# EAGLE board FD Capacitance Sensor v18a (EAGLE 9.6.2)
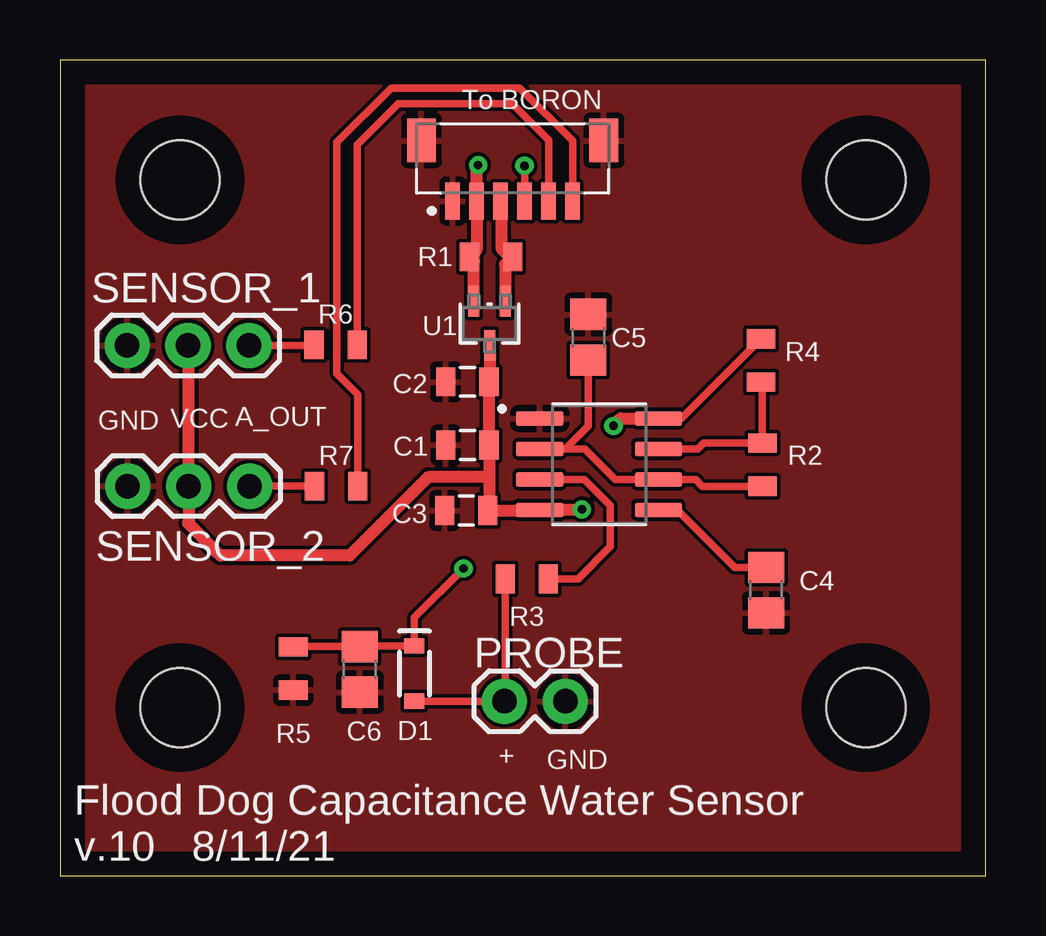
[diagram p0: board, top side]
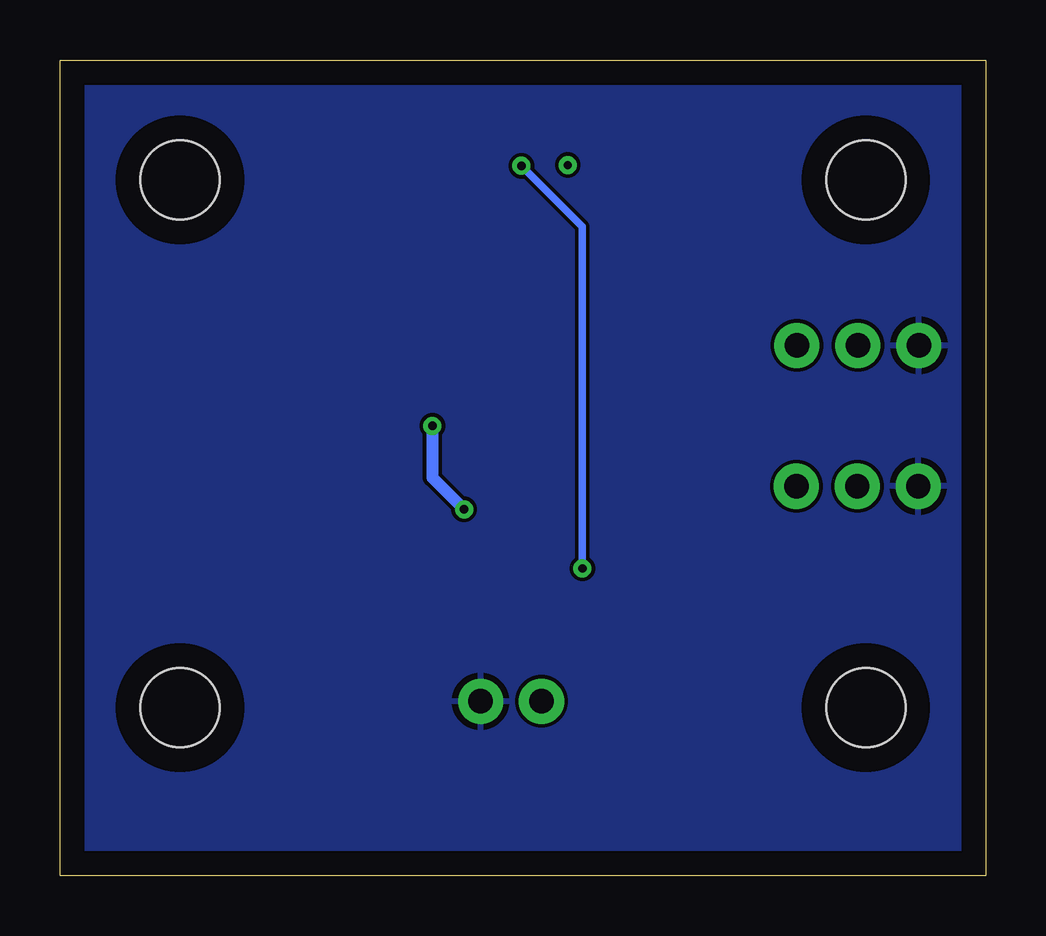
[diagram p1: board, bottom side, seen from below]

Size 38.58 x 34 mm. Coordinates in mm from the lower left corner, seen from the top.
Outline: 0,0 38.58,0 38.58,34 0,34 0,0
Copper layers (1*16): Top 0.035mm / dielectric 1.5mm / Bottom 0.035mm
Design rules "default": minimum track width 6mil, minimum drill 0.35mm, track to track 6mil, track to pad 6mil, pad to pad 6mil, via to via 6mil, smd to smd 6mil, copper to edge 40mil, drill to drill 6mil, minimum pad ring 10mil, minimum via ring 8mil, stop-mask expansion 4mil, vias tented up to drill 0mil, thermal gap 10mil

## Footprints (pad centres in the part's own frame; a part is rotated, then mirrored left to right if it is on the bottom)
0805@1 = smd 0.8 x 1.2: 1 -0.9,0; 2 0.9,0
C0805 = smd 1.3 x 1.5: 1 -0.95,0; 2 0.95,0
SOD-323 = smd 0.63 x 0.83: A 1.15,0; C -1.15,0
JST_BM06B-SRSS-TB(LF)(SN) = smd 0.6 x 1.55: 1 -2.5,-2.525; 2 -1.5,-2.525; 3 -0.5,-2.525; 4 0.5,-2.525; 5 1.5,-2.525; 6 2.5,-2.525 | smd 1.2 x 1.8: S1 -3.8,0; S2 3.8,0
1X02 = drill 1.016 pad 1.88: 1 0,0; 2 2.54,0
0805 = smd 0.8 x 1.2: 1 -0.9,0; 2 0.9,0
1X03 = drill 1.016 pad 1.88: 1 0,0; 2 2.54,0; 3 5.08,0
SOT_101PT1_ONS = smd 0.457 x 1.27: 1 -0.65,-0.914; 2 0.65,-0.914; 3 0,0.914
SOIC127P599X175-8N = smd 1.97 x 0.6: 1 -2.47,1.905; 2 -2.47,0.635; 3 -2.47,-0.635; 4 -2.47,-1.905; 5 2.47,-1.905; 6 2.47,-0.635; 7 2.47,0.635; 8 2.47,1.905
STAND-OFF = hole 3.302: 0,0

## Placement (x,y rotation side)
C1  0.1uF  [0805@1]  16.98,17.95 180 top
C2  1uF  [0805@1]  16.98,20.58 180 top
C3  10nF  [0805@1]  16.93,15.22 180 top
C4  10nf  [C0805]  29.42,11.9 90 top
C5  470pf  [C0805]  22.02,22.44 270 top
C6  1uF  [C0805]  12.49,8.59 90 top
D1  250mA/100V  [SOD-323]  14.77,8.42 270 top
FRAME1  FRAME-LETTERNO_PACKAGE  [DUMMY]  -8.43,-5.36 0 top  (outside the outline)
J1  BM06B-SRSS-TBT(LF)(SN)  [JST_BM06B-SRSS-TB(LF)(SN)]  18.86,30.65 0 top
PROBE  [1X02]  18.52,7.26 0 top
R1  100k  [0805]  17.97,25.79 180 top
R2  1k  [0805]  29.27,17.13 90 top
R3  10k  [0805]  19.45,12.37 180 top
R4  330  [0805]  29.21,21.47 90 top
R5  1M  [0805]  9.72,8.63 90 top
R6  1k  [0805]  11.48,22.12 0 top
R7  1k  [0805]  11.51,16.23 0 top
SENSOR_1  [1X03]  2.79,22.1 0 top
SENSOR_2  [1X03]  2.82,16.23 0 top
U1  NTS4101PT1  [SOT_101PT1_ONS]  17.9,23.01 180 top
U2  TLC555CD  [SOIC127P599X175-8N]  22.46,17.15 0 top
U$1  STAND-OFF  [STAND-OFF]  5,7 0 top
U$2  STAND-OFF  [STAND-OFF]  5,29 0 top
U$3  STAND-OFF  [STAND-OFF]  33.58,29 0 top
U$4  STAND-OFF  [STAND-OFF]  33.58,7 0 top

## Library data of the parts
C1 = Custom Components; HOUSEPART: YES; MPN: MF-CAP-0805-0.1uF; POPULATE: 1; URL: https://factory.macrofab.com/part/MF-CAP-0805-0.1uF
C2 = Custom Components; HOUSEPART: yes; MPN: MF-CAP-0805-1uF; POPULATE: 1; URL: https://factory.macrofab.com/part/MF-CAP-0805-1uF
C3 = Custom Components; DIGIKEY: 399-C0805X103K1RAC3316CT-ND; HOUSEPART: NO; MPN: C0805X103K1RAC3316; POPULATE: 1; URL: https://www.digikey.com/en/products/detail/kemet/C0805X103K1RAC3316/10315780
C4-C6 = rcl; SPICEPREFIX: C
D1 = Custom Components; MPN: BAS16HT1G
FRAME1 = SparkFun-Aesthetics; DESIGNER: Nobody; VERSION: v01
J1 = Custom Components; MPN: BM06B-SRSS-TBT(LF)(SN); POPULATE: 1
PROBE SENSOR_1 SENSOR_2 = SparkFun-Connectors
R1 = Custom Components; MPN: MF-RES-0805-100K; POPULATE: 1; URL: https://factory.macrofab.com/part/MF-RES-0805-100K
R2 R5-R7 = Custom Components; HOUSEPART: YES; MPN: MF-RES-0805-1K; POPULATE: 1; URL: https://factory.macrofab.com/part/MF-RES-0805-1k
R3 = Custom Components; MPN: MF-RES-0805-10K; POPULATE: 1; URL: https://factory.macrofab.com/part/MF-RES-0805-10K
R4 = Custom Components; HOUSEPART: YES; MPN: MF-RES-0805-330; POPULATE: 1
U1 = Custom Components; DATASHEET: https://datasheet.octopart.com/NTS4101PT1-ON-Semiconductor-datasheet-139013286.pdf; MANUFACTURER_PART_NUMBER: NTS4101PT1; SOURCELIBRARY: ON_Semiconductor_2020-03-06; VENDOR: ON Semiconductor
U2 = Custom Components; DESCRIPTION: 2.1-MHz, 250-A, Low-Power Timer 8-SOIC 0 to 70; DIGI-KEY_PART_NUMBER: 296-52992-ND; MF: Texas Instruments; MP: TLC555CD; PACKAGE: SOIC-8 Texas Instruments; PURCHASE-URL: https://pricing.snapeda.com/search/part/TLC555CD/?ref=eda
U$1-U$4 = SparkFun-Hardware

## Nets
!EN: J1.3 R1.1 U1.1
+3V3: J1.2 R1.2 U1.2
GND: C1.2 C2.2 C3.2 C4.1 C5.1 C6.1 J1.1 J1.S1 J1.S2 PROBE.2 R5.1 SENSOR_1.1 SENSOR_2.1 U2.1
N$1: C4.2 U2.5
N$2: R6.1 SENSOR_1.3
N$3: R7.1 SENSOR_2.3
N$5: R3.1 U2.3
N$8: C5.2 R2.1 U2.2 U2.6
N$9: R2.2 R4.1 U2.7
PROBE+: D1.A PROBE.1 R3.2
SIGNAL_A0: C6.2 D1.C J1.4 R5.2
SIGNAL_A1: J1.5 R6.2
SIGNAL_A2: J1.6 R7.2
VCC [VCC]: C1.1 C2.1 C3.1 R4.2 SENSOR_1.2 SENSOR_2.2 U1.3 U2.4 U2.8

## Tracks (layer width: path | path; a pad name or v marks a point on that pad's centre or on a via)
!EN
  Top 0.508: J1.3 18.39,28.09 18.39,26.14 18.74,25.79 R1.1 18.55,25.47 U1.1
+3V3  (via drill 0.35)
  Top 0.508: v17.42,29.62 17.36,29.55 J1.2 17.36,26.08 R1.2 17.25,25.61 U1.2
GND
  pour Top: -0.81,-0.55 -0.81,34.76 39.52,34.76 39.52,-0.55
  pour Bottom: -0.58,-0.35 -0.58,34.5 39.19,34.5 39.19,-0.35
N$1
  Top 0.305: C4.2 28.11,12.85 25.72,15.25 U2.5
N$2
  Top 0.305: SENSOR_1.3 10.55,22.1 R6.1
N$3
  Top 0.305: SENSOR_2.3 R7.1
N$5
  Top 0.305: R3.1 21.59,12.37 22.94,13.71 22.94,15.42 21.84,16.52 U2.3
N$8
  Top 0.305: C5.2 22.02,18.74 21.06,17.79 U2.2 21.86,17.79 23.13,16.52 U2.6 26.48,16.52 26.77,16.23 R2.1
N$9
  Top 0.305: U2.7 26.57,17.79 26.82,18.03 R2.2 29.27,20.51 R4.1
PROBE+
  Top 0.305: R3.2 18.55,7.29 PROBE.1 D1.A
SIGNAL_A0  (via drill 0.35)
  Top 0.305: R5.2 9.73,9.54 C6.2 12.52,9.57 D1.C 14.77,10.76 v16.82,12.8 | v19.36,29.59 19.36,29.59 J1.4
  Bottom 0.305: v16.82,12.8 16.82,27.05 v19.36,29.59
SIGNAL_A1
  Top 0.305: R6.2 12.38,30.47 14.1,32.18 18.85,32.18 20.37,30.66 J1.5
SIGNAL_A2
  Top 0.305: R7.2 12.41,20.05 11.53,20.93 11.53,30.57 13.79,32.83 19.16,32.83 21.36,30.63 J1.6
VCC  (via drill 0.35)
  Top 0.305: 29.08,22.37 R4.2 25.91,19.07 24.95,19.07 U2.8
  Top 0.508: v23.06,18.75 23.37,19.06 U2.8 | v21.74,15.27 20.01,15.27 U2.4 19.97,15.22 C3.1 | 17.88,15.27 C3.1 | 17.88,16.61 C1.1 C2.1 | 17.88,16.61 17.88,15.27 C3.1 | 17.88,16.61 15.34,16.61 12.06,13.34 6.68,13.34 6.48,13.54 5.33,14.68 5.36,14.71 SENSOR_2.2 5.36,22.07 SENSOR_1.2 | C2.1 | U1.3 17.9,20.6 C2.1
  Bottom 0.508: v23.06,18.75 23.06,16.59 v21.74,15.27

## Text on the board
tNames: To BORON | GND | VCC | A_OUT | + | GND | Flood Dog Capacitance Water Sensor / v.10 8/11/21